# EAGLE board servo-pcb (EAGLE 9.6.2)
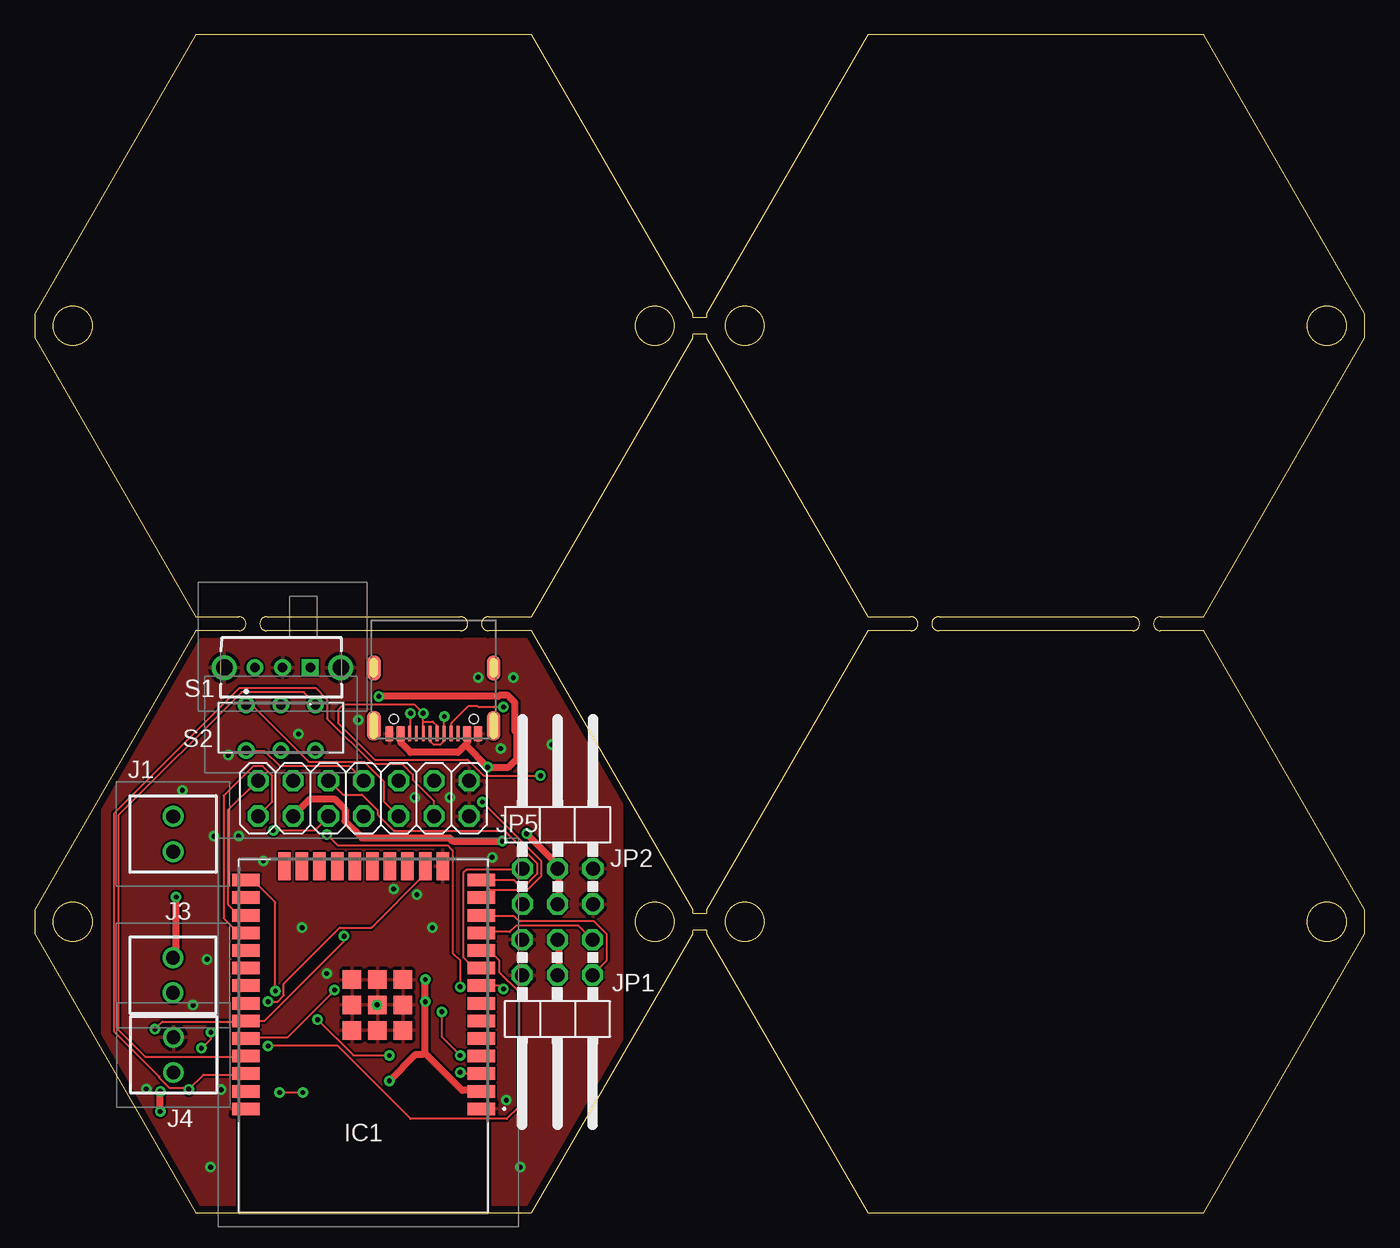
[diagram p0: board, top side]
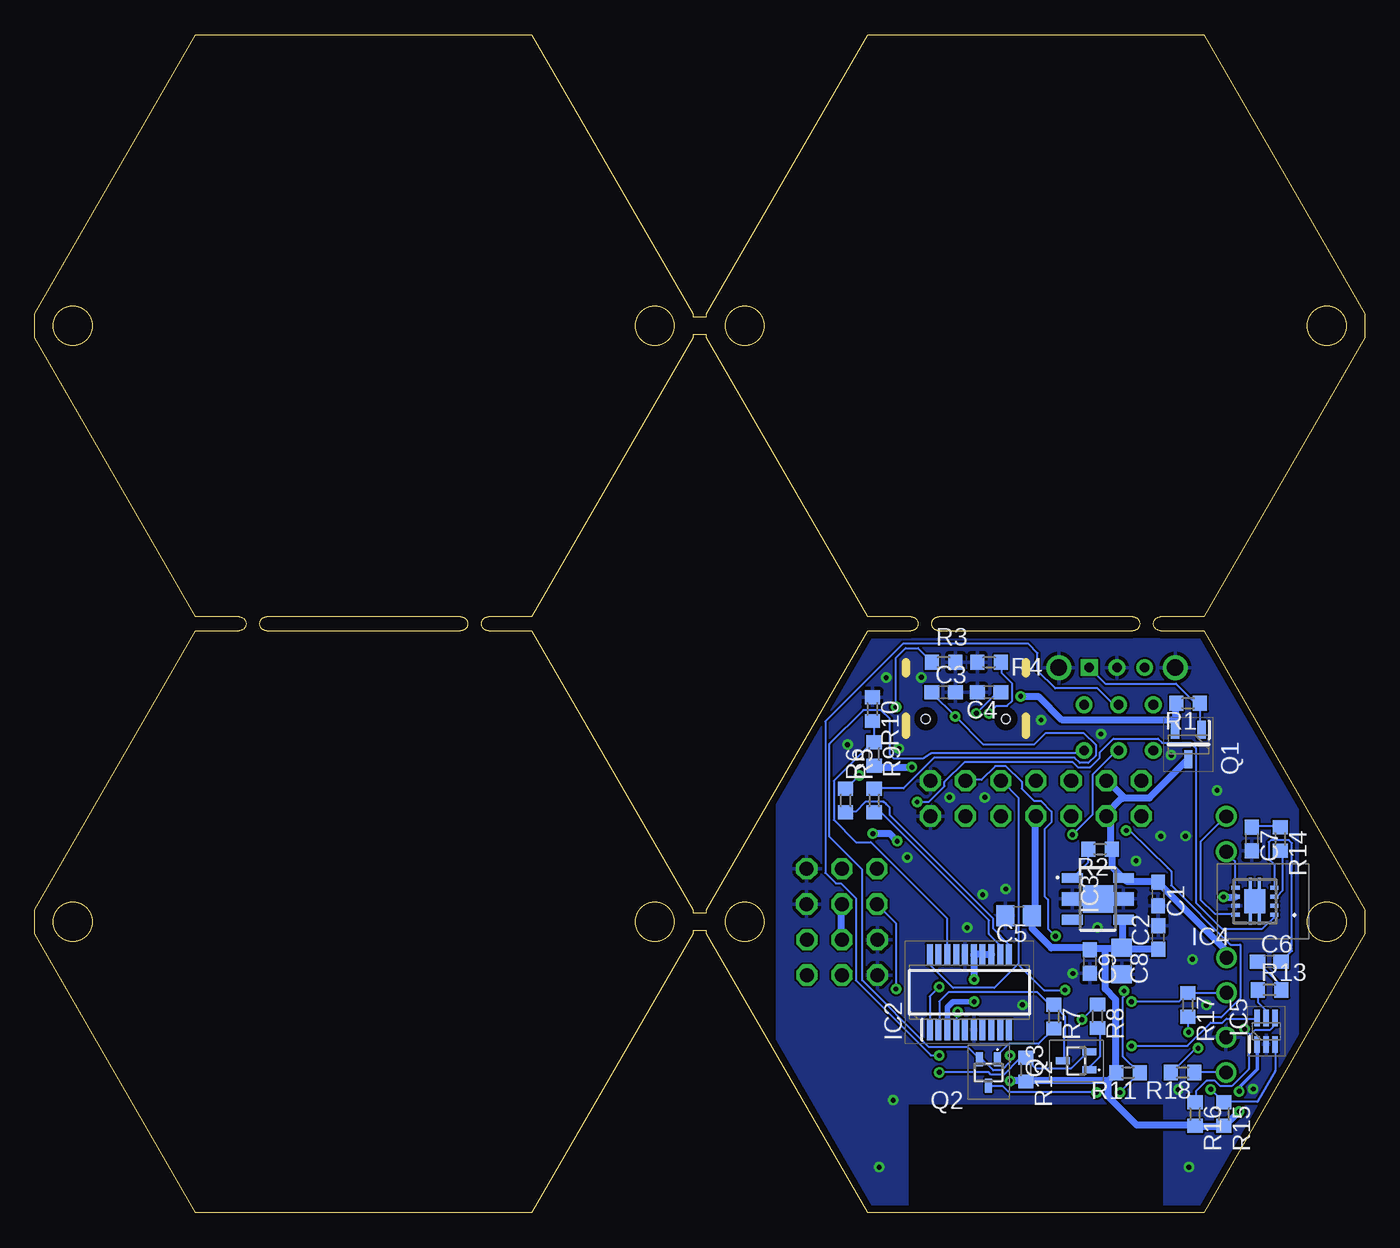
[diagram p1: board, bottom side, seen from below]

Size 96 x 85 mm. Coordinates in mm from the lower left corner, seen from the top.
Outline: 16.75,43 arc180 16.75,42 30.75,42 arc180 30.75,43 16.75,43
Outline: 14.75,42 arc180 14.75,43 11.63,43 0,63.14 0,64.86 11.63,85 35.87,85 47.5,64.86 47.5,64.6 48.5,64.6 48.5,64.86 60.13,85 84.37,85 96,64.86 96,63.14 84.37,43 81.25,43 arc180 81.25,42 84.37,42 96,21.86 96,20.14 84.37,0 60.13,0 48.5,20.14 48.5,20.4 47.5,20.4 47.5,20.14 35.87,0 11.63,0 0,20.14 0,21.86 11.63,42 14.75,42
Outline: 60.13,43 63.25,43 arc-180 63.25,42 60.13,42 48.5,21.86 48.5,21.6 47.5,21.6 47.5,21.86 35.87,42 32.75,42 arc-180 32.75,43 35.87,43 47.5,63.14 47.5,63.4 48.5,63.4 48.5,63.14 60.13,43
Outline: 65.25,43 79.25,43 arc-180 79.25,42 65.25,42 arc-180 65.25,43
Outline: circle at 2.75,64 radius 1.4
Outline: circle at 44.75,64 radius 1.4
Outline: circle at 51.25,64 radius 1.4
Outline: circle at 93.25,64 radius 1.4
Outline: circle at 2.75,21 radius 1.4
Outline: circle at 44.75,21 radius 1.4
Outline: circle at 51.25,21 radius 1.4
Outline: circle at 93.25,21 radius 1.4
Copper layers (1*16): Top 0.035mm / dielectric 1.5mm / Bottom 0.035mm
Design rules "default *": minimum track width 6mil, minimum drill 0.35mm, track to track 6mil, track to pad 6mil, pad to pad 6mil, via to via 6mil, smd to smd 6mil, copper to edge 20mil, drill to drill 6mil, minimum pad ring 10mil, minimum via ring 8mil, stop-mask expansion 4mil, vias tented up to drill 0mil, thermal gap 10mil
Net classes: 1 POWER: width 0.508 mm

## Footprints (pad centres in the part's own frame; a part is rotated, then mirrored left to right if it is on the bottom)
C0603 = smd 1.1 x 1: 1 -0.85,0; 2 0.85,0
C0805 = smd 1.3 x 1.5: 1 -0.95,0; 2 0.95,0
ESP32WROOM32D4MBPS = smd 2 x 0.9: 1 -8.5,5.26; 2 -8.5,3.99; 3 -8.5,2.72; 4 -8.5,1.45; 5 -8.5,0.18; 6 -8.5,-1.09; 7 -8.5,-2.36; 8 -8.5,-3.63; 9 -8.5,-4.9; 10 -8.5,-6.17; 11 -8.5,-7.44; 12 -8.5,-8.71; 13 -8.5,-9.98; 14 -8.5,-11.25; 25 8.5,-11.25; 26 8.5,-9.98; 27 8.5,-8.71; 28 8.5,-7.44; 29 8.5,-6.17; 30 8.5,-4.9; 31 8.5,-3.63; 32 8.5,-2.36; 33 8.5,-1.09; 34 8.5,0.18; 35 8.5,1.45; 36 8.5,2.72; 37 8.5,3.99; 38 8.5,5.26 | smd 0.9 x 2: 15 -5.715,-12.25; 16 -4.445,-12.25; 17 -3.175,-12.25; 18 -1.905,-12.25; 19 -0.635,-12.25; 20 0.635,-12.25; 21 1.905,-12.25; 22 3.175,-12.25; 23 4.445,-12.25; 24 5.715,-12.25 | smd 1.33 x 1.33: 39 -2.835,-0.405; 40 -1,-0.405; 41 0.835,-0.405; 42 0.835,-2.24; 43 -1,-2.24; 44 -2.835,-2.24; 45 -2.835,-4.075; 46 -1,-4.075; 47 0.835,-4.075
SOP64P599X175-20N = smd 1.526 x 0.435: 1 -2.712,2.858; 2 -2.712,2.222; 3 -2.712,1.588; 4 -2.712,0.952; 5 -2.712,0.318; 6 -2.712,-0.318; 7 -2.712,-0.952; 8 -2.712,-1.588; 9 -2.712,-2.222; 10 -2.712,-2.858; 11 2.712,-2.858; 12 2.712,-2.222; 13 2.712,-1.588; 14 2.712,-0.952; 15 2.712,-0.318; 16 2.712,0.318; 17 2.712,0.952; 18 2.712,1.588; 19 2.712,2.222; 20 2.712,2.858
SOT-89-5-1 = smd 0.7 x 1.5: 1 -1.5,-1.85; 3 1.5,-1.85; 4 1.5,1.85; 6 -1.5,1.85 | smd 1 x 1.5: 2 0,-1.85; 5 0,1.85 | smd 2 x 2.2: 7 0,0
TPA2006D1DRBR = smd 0.6 x 0.31: 1 -1.4,0.975; 2 -1.4,0.325; 3 -1.4,-0.325; 4 -1.4,-0.975; 5 1.4,-0.975; 6 1.4,-0.325; 7 1.4,0.325; 8 1.4,0.975 | smd 1.5 x 1.75: 9 0,0 | smd 0.23 x 0.825: 10 -0.325,1.288; 11 0.325,1.288; 12 -0.325,-1.288; 13 0.325,-1.288
SOT65P210X110-6N = smd 1.2 x 0.4: 1 -0.95,0.65; 2 -0.95,0; 3 -0.95,-0.65; 4 0.95,-0.65; 5 0.95,0; 6 0.95,0.65
WJEK25425402P14000A = drill 1 pad 1.5: 1 0,0; 2 2.54,0
2X03/90 = drill 1.016 octagon: 1 -2.54,-6.35; 2 -2.54,-3.81; 3 0,-6.35; 4 0,-3.81; 5 2.54,-6.35; 6 2.54,-3.81
2X07 = drill 1.016 octagon: 1 -7.62,-1.27; 2 -7.62,1.27; 3 -5.08,-1.27; 4 -5.08,1.27; 5 -2.54,-1.27; 6 -2.54,1.27; 7 0,-1.27; 8 0,1.27; 9 2.54,-1.27; 10 2.54,1.27; 11 5.08,-1.27; 12 5.08,1.27; 13 7.62,-1.27; 14 7.62,1.27
SOT95P237X112-3N = smd 1.3 x 0.6: 1 -1.05,0.95; 2 -1.05,-0.95; 3 1.05,0
SSM3K7002CFULF = smd 0.5 x 1: 1 -0.65,-0.95; 2 0.65,-0.95; 3 0,0.95
R0603 = smd 1 x 1.1: 1 -0.85,0; 2 0.85,0
SK12D11VG3 = drill 0.7 pad 1.2 square: 1 0,0 | drill 0.7 pad 1.2: 2 2,0; 3 4,0 | drill 1.2 pad 1.8: MH1 -2.2,0; MH2 6.2,0
IS2235 = drill 0.7 pad 1.2: 1 -2.5,1.65; 2 0,1.65; 3 2.5,1.65; 4 -2.5,-1.65; 5 0,-1.65; 6 2.5,-1.65
5077CR-16SMC2-BK-TR = smd 0.6 x 1.14: A1,B12:GND -3.2,0; A4,B9:V_BUS -2.4,0; B1,A12:GND 3.2,0; B4,A9:VBUS 2.4,0 | smd 0.3 x 1.14: A5:CC1 -1.25,0; A6:DP1 -0.25,0; A7:DN1 0.25,0; A8:SBU1 1.25,0; B5:CC2 1.75,0; B6:DP2 0.75,0; B7:DN2 -0.75,0; B8:SBU2 -1.75,0 | smd 1 x 2.1: S1 -4.32,-0.57; S2 4.32,-0.57 | smd 1 x 1.8: S3 -4.32,-4.75; S4 4.32,-4.75 | hole 0.65: -2.89,-1.07; 2.89,-1.07

## Placement (x,y rotation side)
C1  0.33uF  [C0603]  14.92,23 270 bottom
C2  1uF  [C0603]  14.91,19.87 90 bottom
C3  39pF  [C0603]  30.4,37.56 0 bottom
C4  39pF  [C0603]  27.12,37.56 180 bottom
C5  10uF  [C0805]  24.98,21.43 180 bottom
C6  1uF  [C0603]  6.9,18.12 0 bottom
C7  1uF  [C0603]  8.17,26.98 270 bottom
C8  10uF  [C0805]  17.55,18.16 270 bottom
C9  0.01uF  [C0603]  19.85,18.14 270 bottom
IC1  ESP32-WROOM-32D__4MB_PS_  [ESP32WROOM32D4MBPS]  23.74,12.76 180 top
IC2  FT231XS-R  [SOP64P599X175-20N]  28.54,15.92 90 bottom
IC3  NJM2884U1-33-TE1  [SOT-89-5-1]  19.26,22.65 270 bottom
IC4  TPA2006D1DRBR  [TPA2006D1DRBR]  7.94,22.48 180 bottom
IC5  ISL90728UIE627Z-TK  [SOT65P210X110-6N]  7.12,13.1 90 bottom
J1  WJEK254-2.54-02P-140-00A  [WJEK25425402P14000A]  9.99,28.6 270 top
J3  WJEK254-2.54-02P-140-00A  [WJEK25425402P14000A]  9.98,15.87 90 top
J4  WJEK254-2.54-02P-140-00A  [WJEK25425402P14000A]  10.02,10.13 90 top
JP1  SERVO1  [2X03/90]  37.73,13.35 180 top
JP2  SERVO2  [2X03/90]  37.74,28.63 0 top
JP5  [2X07]  23.74,29.9 180 top
Q1  IRLML6402  [SOT95P237X112-3N]  12.73,33.79 270 bottom
Q2  2SC2712-GR_F_  [SSM3K7002CFULF]  27.16,10.13 180 bottom
Q3  2SC2712-GR_F_  [SSM3K7002CFULF]  20.83,10.97 90 bottom
R1  10k  [R0603]  12.75,36.76 180 bottom
R2  1k  [R0603]  19.11,26.23 180 bottom
R3  4.7k  [R0603]  30.39,39.72 180 bottom
R4  4.7k  [R0603]  27.11,39.72 0 bottom
R5  27  [R0603]  35.41,29.74 270 bottom
R6  27  [R0603]  37.48,29.75 270 bottom
R7  12k  [R0603]  22.45,14.15 270 bottom
R8  12k  [R0603]  19.29,14.19 270 bottom
R9  4.7k  [R0603]  35.42,33.1 270 bottom
R10  10k  [R0603]  35.54,36.34 270 bottom
R11  10k  [R0603]  17.09,10.11 180 bottom
R12  10k  [R0603]  24.47,10.33 270 bottom
R13  100k  [R0603]  6.87,16.09 0 bottom
R14  100k  [R0603]  6.11,26.98 270 bottom
R15  1k  [R0603]  10.17,7.13 270 bottom
R16  1k  [R0603]  12.25,7.13 270 bottom
R17  0  [R0603]  12.77,15.01 270 bottom
R18  0  [R0603]  13.16,10.13 180 bottom
S1  SK-12D11VG3  [SK12D11VG3]  19.89,39.34 180 top
S2  IS-2235  [IS2235]  17.77,35.01 0 top
U$1  5077CR-16-SMC2-BK-TR  [5077CR-16SMC2-BK-TR]  28.8,34.57 180 top

## Library data of the parts
C1-C9 = rcl; SPICEPREFIX: C
IC1 = SamacSys_Parts; DESCRIPTION: WiFi Modules (802.11); HEIGHT: 3.2mm; MANUFACTURER_NAME: Espressif Systems; MANUFACTURER_PART_NUMBER: ESP32-WROOM-32D (4MB PS); MOUSER_PART_NUMBER: 356-ESPWROOM3200PS3; MOUSER_PRICE-STOCK: https://www.mouser.co.uk/ProductDetail/Espressif-Systems/ESP32-WROOM-32D-4MB-PS?qs=GBLSl2Akirs5uooPY1MBgw%3D%3D
IC2 = SamacSys_Parts; ARROW_PART_NUMBER: FT231XS-R; ARROW_PRICE-STOCK: https://www.arrow.com/en/products/ft231xs-r/ftdi-chip?region=nac; DESCRIPTION: FTDI Chip FT231XS-R, Interface RS232, RS422, RS485, SIE, UART 3MBd, 5 V, 20-pin, SSOP; HEIGHT: 1.753mm; MANUFACTURER_NAME: FTDI Chip; MANUFACTURER_PART_NUMBER: FT231XS-R; MOUSER_PART_NUMBER: 895-FT231XS-R; MOUSER_PRICE-STOCK: https://www.mouser.co.uk/ProductDetail/FTDI/FT231XS-R?qs=Gp1Yz1mis3WduRPsgrTbtg%3D%3D
IC3 = SamacSys_Parts; DESCRIPTION: Low Dropout Voltage Regulator New Japan Radio NJM2884U1-33-TE1, LDO Voltage Regulator, 0.65A, 3.3 V +/-1%, 5-Pin SOT-89; HEIGHT: mm; MANUFACTURER_NAME: New Japan Radio; MANUFACTURER_PART_NUMBER: NJM2884U1-33-TE1; MOUSER_PART_NUMBER: 513-NJM2884U1-33-TE1; MOUSER_PRICE-STOCK: https://www.mouser.co.uk/ProductDetail/NJR/NJM2884U1-33-TE1?qs=3unH%2FDqlvl8RhrRFn1uloA%3D%3D
IC4 = SamacSys_Parts; ARROW_PART_NUMBER: TPA2006D1DRBR; ARROW_PRICE-STOCK: https://www.arrow.com/en/products/tpa2006d1drbr/texas-instruments?region=nac; DESCRIPTION: 1.45-W Mono Class-D Audio Amplifier with 1.8V Compatible Shutdown Voltage (TPA2006); HEIGHT: 1mm; MANUFACTURER_NAME: Texas Instruments; MANUFACTURER_PART_NUMBER: TPA2006D1DRBR; MOUSER_PART_NUMBER: 595-TPA2006D1DRBR; MOUSER_PRICE-STOCK: https://www.mouser.co.uk/ProductDetail/Texas-Instruments/TPA2006D1DRBR?qs=SnxTrzcm0Gh2qVAbmaRmZA%3D%3D
IC5 = SamacSys_Parts; DESCRIPTION: DCPs Single Volatile 128-Tap Digitally Controlled Potentiometer (XDCP); HEIGHT: 1.1mm; MANUFACTURER_NAME: Renesas Electronics; MANUFACTURER_PART_NUMBER: ISL90728UIE627Z-TK; MOUSER_PART_NUMBER: 968-ISL90728UIE627ZT; MOUSER_PRICE-STOCK: https://www.mouser.co.uk/ProductDetail/Renesas-Intersil/ISL90728UIE627Z-TK?qs=dAsayXGOMrvlFcRbd2EYPg%3D%3D
J1 J3 J4 = SamacSys_Parts; DESCRIPTION: Wire to Board Connector; HEIGHT: 8.64mm; MANUFACTURER_NAME: Cixi Wanjie Electronic Co., Ltd; MANUFACTURER_PART_NUMBER: WJEK254-2.54-02P-140-00A
JP1 JP2 JP5 = pinhead
Q1 = SamacSys_Parts; DESCRIPTION: P-Channel MOSFET Transistor, 3.7 A, 20 V, 3-Pin SOT-23 International Rectifier IRLML6402; HEIGHT: 1.12mm; MANUFACTURER_NAME: Infineon; MANUFACTURER_PART_NUMBER: IRLML6402; MOUSER_PART_NUMBER: N/A; MOUSER_PRICE-STOCK: https://www.mouser.co.uk/ProductDetail/Infineon-IR/IRLML6402?qs=Gkr2N%2F2q3o277qI%252BRzUP%252Bw%3D%3D
Q2 Q3 = SamacSys_Parts; DESCRIPTION: Vceo50V,Ic0.15A,Vce(sat)0.25V,hfe200to40 Toshiba 2SC2712-GR(F) NPN Bipolar Transistor, 0.15 A, 50 V, 3-Pin SC-59; HEIGHT: mm; MANUFACTURER_NAME: Toshiba; MANUFACTURER_PART_NUMBER: 2SC2712-GR(F)
R1-R18 = rcl; SPICEPREFIX: R
S1 = SamacSys_Parts; DESCRIPTION: Slide Switch; HEIGHT: 3.8mm; MANUFACTURER_NAME: Xiamen; MANUFACTURER_PART_NUMBER: SK-12D11VG3
S2 = SamacSys_Parts; DESCRIPTION: Tiny Slide Switch, 2P2T; HEIGHT: 5mm; MANUFACTURER_NAME: Switronic; MANUFACTURER_PART_NUMBER: IS-2235
U$1 = FaBo-Connetor

## Nets
+3V3 [POWER]: C2.1 C5.1 C8.1 C9.1 IC1.2 IC2.3 IC2.13 IC2.14 IC2.15 IC3.4 IC5.1 JP5.8 R11.2 R12.2 R15.2 R16.2
DTR: IC2.1 S2.5
GND: C1.2 C2.2 C3.2 C4.2 C5.2 C7.2 C8.2 C9.2 IC1.1 IC1.15 IC1.38 IC1.39 IC1.40 IC1.41 IC1.42 IC1.43 IC1.44 IC1.45 IC1.46 IC1.47 IC2.6 IC2.16 IC3.2 IC3.5 IC4.7 IC5.2 J4.2 JP1.5 JP1.6 JP2.5 JP2.6 JP5.1 JP5.2 R3.1 R4.1 R10.1 S1.2 S1.MH1 S1.MH2 U$1.A1,B12:GND U$1.B1,A12:GND
IO12: IC1.14 JP5.9
IO13: JP5.10 R17.2 R18.2
N$1: C4.1 R6.1 U$1.A6:DP1 U$1.B6:DP2
N$2: Q1.1 R1.1 S1.1
N$3: IC3.1 R2.2
N$4: IC1.28 JP5.14
N$5: C3.1 R5.1 U$1.A7:DN1 U$1.B7:DN2
N$6: IC1.34 IC2.20 JP5.5
N$7: IC2.12 R5.2
N$8: IC2.11 R6.2
N$9: IC2.2 Q3.3 R7.1
N$10: Q2.1 R7.2
N$11: Q2.2 R8.1 S2.6
N$12: Q3.1 R8.2
N$13: IC2.18 R9.1 R10.2
N$14: IC1.3 Q3.2 R12.1
N$15: IC1.25 Q2.3 R11.1
N$16: IC1.35 S2.3
N$17: JP5.7 S2.4
N$18: IC5.5 R13.1
N$19: C6.1 R13.2
N$20: C6.2 IC4.4
N$21: IC4.3 R14.2
N$22: C7.1 R14.1
N$23: IC1.36 IC5.3 JP5.4 R15.1
N$24: IC1.33 IC5.4 JP5.3 R16.1
N$25: IC1.13 IC4.1
N$26: IC4.8 J1.1
N$27: IC4.5 J1.2
N$28: IC1.10 IC5.6
N$29: IC1.16 J3.1 R17.1
N$30: IC1.11 JP1.1
N$31: IC1.12 JP1.2
N$32: IC1.8 JP2.1
N$33: IC1.9 JP2.2
N$34: IC1.27 JP5.13
N$35: R4.2 U$1.B5:CC2
N$36: J4.1 R18.1
N$41: JP5.6 S2.1
N$42: R3.2 U$1.A5:CC1
RXD: IC2.4 S2.2
VCC [POWER]: Q1.2 R1.2 R9.2 U$1.A4,B9:V_BUS U$1.B4,A9:VBUS
VDD [POWER]: C1.1 IC3.6 IC4.6 J3.2 JP1.3 JP1.4 JP2.3 JP2.4 JP5.11 JP5.12 Q1.3 R2.1

## Tracks (layer width: path | path; a pad name or v marks a point on that pad's centre or on a via)
+3V3  (via drill 0.35)
  Top 0.508: 28.19,11.51 v28.19,15.24 v28.19,16.84 | 28.19,11.51 30.86,8.84 32.23,8.84 IC1.2 | v25.6,9.53 27.51,11.43 27.96,11.43 28.19,11.51 | v9.07,7.32 v9.07,8.76
  Bottom 0.254: v9.07,8.76 9.07,9.07 7.77,10.37 IC5.1
  Bottom 0.406: IC2.3 30.12,14.83 29.72,15.24 v28.19,15.24
  Bottom 0.508: 18.75,19.05 17.6,19.05 C8.1 | 18.75,19.05 19.81,19.05 C9.1 20.04,19.13 22.63,19.13 24,20.5 24,21.41 C5.1 23.93,21.64 23.77,21.79 23.77,28.57 JP5.8 | C2.1 14.94,19.05 17.3,19.05 C8.1 | IC3.4 17.45,21.11 17.45,19.36 C8.1 | 27.58,18.67 26.98,18.67 IC2.13 | 27.58,18.67 IC2.14 | 27.58,18.67 28.19,18.67 IC2.15 28.19,18.44 v28.19,16.84 | 18.52,9.53 24.46,9.53 R12.2 24.69,9.53 v25.6,9.53 | 18.52,9.53 17.98,10.06 R11.2 17.98,10.36 17.98,15.39 18.75,16.15 18.75,19.05 | v9.07,7.32 9.98,6.4 R15.2 10.21,6.25 12.19,6.25 R16.2 12.5,6.33 16.46,6.33 18.52,8.38 18.52,9.53
DTR  (via drill 0.35)
  Top 0.152: v30.71,16.31 30.71,18.21 30.18,18.75 30.18,26.14 29.79,26.52 21.87,26.52 v21.11,27.28
  Bottom 0.152: v30.71,16.31 31.39,15.62 31.39,13.26 IC2.1 | v21.11,27.28 19.66,28.73 19.66,31.62 17.98,33.3 17.83,33.3 S2.5
GND  (via drill 0.35)
  other vias: 32,38.63 34.54,38.61 33.63,33.5 23.37,35.56 29.97,29.97 28.7,20.57 27.58,22.96 24.71,15.01 34.04,8.13 21.08,17.27 10.67,30.48 12.45,18.29 8.05,8.94 12.7,3.3 35.05,3.3 11.43,14.99 12.95,27.18 14.73,27.18 25.91,23.37 19.3,20.57 16.51,25.4 13.97,33.02 19.05,34.54 37.34,33.78 33.02,25.65 27.43,29.97 13.46,8.89
  pour Top: 11.29,41.4 4.83,30.06 4.83,11.93 11.68,0 14.48,0 14.48,8.13 33.02,8.13 33.02,0 35.81,0 42.42,11.49 42.42,30.57 36.11,41.4
  pour Bottom: 4.83,30.11 4.83,11.8 11.68,0 14.48,0 14.48,7.87 33.02,7.87 33.02,0 35.81,0 42.42,11.37 42.42,30.54 36.11,41.4 11.39,41.4
IO12
  Top 0.152: IC1.14 32.31,24 34.59,24 34.82,23.77 35.59,23.77 36.27,24.46 36.27,25.22 33.91,27.58 25.91,27.58 24.77,28.73 24.77,29.03 23.62,30.18 22.25,30.18 21.26,31.17 JP5.9
IO13  (via drill 0.35)
  Top 0.152: v12.72,13.03 12.72,12.57 v12.04,11.89 | v17.22,27.58 20.19,27.58 21.18,28.57 JP5.10
  Bottom 0.152: v12.72,13.03 12.72,14.1 R17.2 12.65,14.1 10.36,14.1 8.99,15.47 8.99,19.36 9.7,19.36 13.97,23.62 13.97,24.64 14.22,24.89 16.96,27.58 v17.22,27.58 | v12.04,11.89 12.19,11.89 13.95,10.13 R18.2
N$1  (via drill 0.35)
  Top 0.152: 28.04,35.43 28.04,34.59 U$1.B6:DP2 | 28.04,35.43 v28.04,36.04 27.43,36.65 22.28,36.65 21.92,36.3 21.92,35.31 24.54,32.69 31.24,32.69 32.38,31.55 v36.5,31.55 | 28.04,35.43 28.73,35.43 29.03,35.13 29.03,34.59 U$1.A6:DP1
  Bottom 0.152: v28.04,36.04 26.59,37.49 26.29,37.49 C4.1 | v36.5,31.55 37.41,30.63 R6.1
N$2
  Bottom 0.152: Q1.1 11.81,34.9 11.89,34.98 11.89,36.73 R1.1 11.96,36.8 12.27,36.8 13.64,38.18 18.75,38.18 19.89,39.32 S1.1
N$3
  Bottom 0.152: R2.2 19.96,26.21 19.96,25.3 IC3.1
N$4
  Top 0.152: IC1.28 15.24,20.27 14.63,20.27 13.64,21.26 13.64,30.1 15.77,32.23 16.46,32.23 17.14,31.55 17.14,29.64 16.15,28.65 JP5.14
N$5  (via drill 0.35)
  Top 0.152: v29.57,35.81 29.57,34.59 U$1.B7:DN2 29.49,34.52 29.49,33.98 29.26,33.76 28.8,33.76 28.57,33.98 28.57,34.52 U$1.A7:DN1
  Bottom 0.152: C3.1 31.24,37.49 v29.57,35.81 27.53,33.78 23.88,33.78 23.06,34.59 20.27,34.59 19.43,33.76 19.43,32.99 19.96,32.46 20.57,32.46 20.95,32.84 31.09,32.84 33.3,30.63 35.36,30.63 R5.1
N$6  (via drill 0.35)
  Top 0.152: v21.64,16.08 18.21,12.65 15.24,12.65 IC1.34
  Bottom 0.152: 25.03,17.95 24.99,17.98 24.99,29.95 26.21,31.17 JP5.5 | 25.03,17.95 26.75,16.23 29.72,16.23 31.39,17.91 31.39,18.59 IC2.20 | v21.64,16.08 23.16,16.08 25.03,17.95
N$7
  Bottom 0.152: R5.2 35.36,28.88 34.9,28.88 27.13,21.11 27.13,20.12 26.36,19.36 26.36,18.67 IC2.12
N$8
  Bottom 0.152: IC2.11 25.68,19.36 26.82,20.5 26.82,21.23 34.29,28.7 34.29,29.21 34.54,29.46 34.75,29.64 36.04,29.64 36.73,28.96 37.41,28.96 R6.2
N$9
  Bottom 0.152: Q3.3 21.72,10.97 21.72,12.65 21.64,12.72 21.64,14.17 22.4,14.94 R7.1 22.81,15.09 23.65,15.93 30.05,15.93 30.71,15.27 30.71,13.26 IC2.2
N$10
  Bottom 0.152: Q2.1 26.44,11.12 26.44,11.43 25.68,12.19 23.55,12.19 22.48,13.26 R7.2
N$11  (via drill 0.35)
  Top 0.152: v25.6,11.35 23.01,11.35 v20.42,13.95
  Bottom 0.152: v25.6,11.35 25.6,10.9 26.21,10.29 26.82,10.29 27.58,11.05 27.74,11.05 Q2.2 27.81,11.12 28.65,11.96 31.47,11.96 36.27,16.76 36.27,24.77 38.63,27.13 38.63,33.83 36.2,36.27 34.92,36.27 34.29,35.64 34.29,33.07 33.98,32.77 31.9,32.77 31.29,33.15 20.48,33.15 S2.6 | v20.42,13.95 19.36,15.01 R8.1
N$12
  Bottom 0.152: Q3.1 19.81,10.36 19.81,10.59 19.13,11.28 19.13,13.18 R8.2
N$13
  Bottom 0.152: R10.2 35.51,35.43 35.43,35.36 35.43,33.98 R9.1 35.51,33.98 38.33,31.17 38.33,28.35 36.73,26.75 35.66,26.75 30.18,21.26 30.18,18.67 IC2.18
N$14  (via drill 0.35)
  Top 0.152: v30.71,10.13 30.79,10.06 32.23,10.06 IC1.3
  Bottom 0.152: Q3.2 19.89,11.58 20.04,11.58 21.18,10.44 23.77,10.44 24.46,11.12 R12.1 24.54,11.12 24.92,11.12 26.06,9.98 26.98,9.98 27.13,10.13 v30.71,10.13
N$15  (via drill 0.35)
  Top 0.152: v17.68,8.69 v19.36,8.69 | v17.37,16 17.37,22.4 15.77,24 IC1.25
  Bottom 0.152: v19.36,8.69 25.68,8.69 26.14,9.14 27.13,9.14 Q2.3 | v17.68,8.69 16.31,10.06 R11.1 16.31,10.13 17.45,11.28 17.45,15.54 17.37,15.62 v17.37,16
N$16
  Top 0.152: IC1.35 15.24,11.28 7.98,11.28 6.04,13.21 6.04,28.68 14.94,37.57 19.43,37.57 20.27,36.73 S2.3
N$17
  Top 0.152: S2.4 15.32,33.3 16.61,33.3 17.7,32.21 22.73,32.21 23.7,31.24 JP5.7
N$18
  Bottom 0.152: R13.1 7.7,16.08 7.7,15.16 7.16,14.63 7.16,14.1 IC5.5
N$19
  Bottom 0.152: R13.2 6.1,16.15 6.1,16.46 7.7,18.06 C6.1
N$20
  Bottom 0.152: IC4.4 6.55,23.47 6.55,25.15 6.93,25.53 6.93,26.75 6.78,26.9 5.49,26.9 5.26,26.67 5.26,18.9 6.02,18.14 C6.2
N$21
  Bottom 0.152: IC4.3 6.48,22.86 6.33,22.86 5.94,23.24 5.94,25.91 6.1,26.06 R14.2
N$22
  Bottom 0.152: C7.1 8.15,27.89 6.17,27.89 R14.1
N$23  (via drill 0.35)
  Top 0.152: IC1.36 15.24,9.98 12.19,9.98 v11.12,8.91 11.12,8.99 9.75,8.99 8.99,9.75 8.99,9.83 5.74,13.08 5.74,28.83 14.78,37.87 20.27,37.87 21.11,37.03 21.11,35.66 24.38,32.38 26.52,32.38 27.28,31.62 27.28,31.24 28.8,29.72 28.8,28.65 JP5.4
  Bottom 0.152: IC5.3 6.48,12.12 6.48,10.26 7.77,8 10.13,8 R15.1 10.21,8 v11.12,8.91
N$24  (via drill 0.35)
  Top 0.152: v8.69,13.26 9.22,13.79 15.24,13.79 IC1.33 15.24,13.87 16.61,13.87 22.33,19.58 v22.33,19.96
  Bottom 0.152: 8.27,12.84 7.92,13.18 6.86,13.18 6.48,13.56 6.48,14.02 IC5.4 | 8.27,12.84 8.38,12.72 8.38,10.36 9.6,9.14 10.44,9.14 10.82,9.53 11.43,9.53 12.19,8.76 12.19,8 R16.1 | 8.27,12.84 v8.69,13.26 | JP5.3 28.8,31.24 27.66,31.24 26.67,32.23 25.91,32.23 24.77,31.09 24.77,30.61 23.88,29.72 23.37,29.72 22.61,28.96 22.61,28.19 23.11,27.69 23.11,22.86 22.86,22.61 22.86,20.5 v22.33,19.96
N$25  (via drill 0.35)
  Top 0.152: v32.31,29.64 36.58,25.38 36.58,24.31 35.59,23.32 32.84,23.32 32.31,22.78 IC1.13
  Bottom 0.152: v32.31,29.64 31.47,29.64 30.33,30.79 30.33,31.09 28.88,32.54 21.11,32.54 20.73,32.16 19.81,32.16 19.13,32.84 19.13,33.22 18.14,34.21 14.94,34.21 14.63,33.91 12.57,33.91 12.19,33.53 12.19,22.38 10.31,20.5 7.39,20.5 6.55,21.34 6.55,21.49 IC4.1
N$26
  Bottom 0.152: IC4.8 9.37,21.57 10.82,21.57 11.86,22.61 11.86,26.77 10.06,28.57 J1.1
N$27
  Bottom 0.152: IC4.5 9.37,23.47 9.37,25.38 9.98,25.98 J1.2
N$28  (via drill 0.35)
  Top 0.152: v16.84,12.04 21.87,12.04 27.13,6.78 34.06,6.78 34.95,7.67 34.95,15.95 33.53,17.37 33.53,18.21 32.84,18.9 32.31,18.9 IC1.10
  Bottom 0.152: v16.84,12.04 12.8,12.04 11.12,13.72 10.29,13.72 9.98,14.02 7.77,14.02 IC5.6
N$29  (via drill 0.35)
  Top 0.152: v16.84,15.24 17.53,15.24 17.98,15.7 17.98,16.54 22.02,20.57 24.31,20.57 28.12,24.38 28.12,24.99 IC1.16
  Bottom 0.152: J3.1 9.98,15.85 12.72,15.85 R17.1 12.8,15.85 13.41,15.24 v16.84,15.24
N$30
  Top 0.152: IC1.11 32.31,20.27 34.29,20.27 34.75,20.73 39.24,20.73 40.23,19.74 JP1.1
N$31
  Top 0.152: IC1.12 32.31,21.41 34.59,21.41 34.98,21.03 40.39,21.03 41.3,20.12 41.3,18.21 40.31,17.22 JP1.2
N$32  (via drill 0.35)
  Top 0.152: v33.83,16.15 33.6,16.38 32.31,16.38 IC1.8
  Bottom 0.152: v33.83,16.15 33.83,20.88 35.2,22.25 JP2.1
N$33
  Top 0.152: IC1.9 32.23,17.68 31.7,17.68 30.94,18.44 30.94,24.54 31.17,24.77 35.2,24.77 JP2.2
N$34
  Top 0.152: IC1.27 15.24,21.49 14.71,21.49 13.95,22.25 13.95,29.03 16.08,31.17 JP5.13
N$35  (via drill 0.35)
  Top 0.152: v27.13,36.04 27.13,34.67 27.05,34.59 U$1.B5:CC2
  Bottom 0.152: v27.13,36.04 26.59,36.58 25.83,36.58 25.45,36.96 25.45,38.18 26.21,38.94 26.21,39.7 R4.2
N$36
  Bottom 0.152: R18.1 12.27,10.13 10.06,10.13 J4.1
N$41
  Top 0.152: S2.1 15.32,36.65 15.67,36.65 19.81,32.51 23.8,32.51 25.22,31.09 25.22,29.64 26.21,28.65 JP5.6
N$42  (via drill 0.35)
  Top 0.152: v33.83,36.5 32,36.5 31.93,36.58 31.32,36.58 30.1,35.36 30.1,34.59 U$1.A5:CC1
  Bottom 0.152: v33.83,36.5 33.83,40.06 33.15,40.74 32.25,40.74 R3.2
RXD  (via drill 0.35)
  Top 0.152: v29.39,14.5 29.39,12.68 v30.71,11.35
  Bottom 0.152: v30.71,11.35 31.32,11.35 36.73,16.76 36.73,22.71 37.8,23.77 38.18,23.77 38.94,24.54 38.94,35.46 33.35,41.05 24.28,41.05 23.62,40.39 23.62,39.12 22.35,37.85 19.3,37.85 18.12,36.66 S2.2 | v29.39,14.5 29.49,14.4 IC2.4
VCC  (via drill 0.35)
  Top 0.508: 31.09,33.76 v32.69,32.16 34.19,32.16 34.8,32.77 34.8,34.62 34.67,34.75 34.67,36.8 34.14,37.34 33.53,37.34 33.45,37.26 v24.84,37.26 | U$1.A4,B9:V_BUS 31.24,34.52 31.24,33.91 31.09,33.76 | 31.09,33.76 30.56,33.22 27.13,33.22 26.44,33.91 26.44,34.52 U$1.B4,A9:VBUS
  Bottom 0.508: 13.64,35.59 13.64,34.9 Q1.2 | 13.64,35.59 13.64,36.73 R1.2 | R9.2 35.33,32.16 v32.69,32.16 | 13.64,35.59 21.89,35.59 23.57,37.26 v24.84,37.26
VDD  (via drill 0.35)
  Top 0.508: JP1.4 37.8,17.22 37.8,19.66 JP1.3 | JP2.3 37.8,22.33 37.8,24.77 JP2.4 37.64,25.07 37.64,25.22 v35.51,27.36 | v10.21,22.78 10.21,18.67 9.98,18.44 J3.2 | v33.76,26.82 30.18,26.82 29.95,27.05 23.62,27.05 22.4,28.27 22.4,29.11 21.64,29.87 19.89,29.87 18.67,28.65 JP5.12
  Bottom 0.508: JP1.3 37.8,19.74 37.8,22.25 JP2.3 | 17.37,29.95 15.54,29.95 12.8,32.69 Q1.3 | 17.37,29.95 18.59,31.17 JP5.11 | v10.21,22.78 9.37,22.78 IC4.6 | J3.2 9.98,18.44 9.98,18.9 14.78,23.7 C1.1 14.94,23.93 17.22,23.93 17.37,24.08 IC3.6 17.6,24.31 18.21,24.92 18.21,26.21 R2.1 18.36,26.44 18.36,28.35 18.59,28.57 JP5.12 18.59,28.88 17.6,29.87 17.37,29.95 | v35.51,27.36 34.29,27.36 v33.76,26.82